# Altium PCB pure60.PcbDoc
Units mm, origin at the board's own origin, x right, y up, seen from the top; angles counter-clockwise.
Board outline 285.25 x 94.86 mm, 2 copper layers (Component Side, Bottom Layer), stack 1.571 mm thick; 142 components, 96 nets, 586 pads, 26 vias.
Unrouted connection lines stored in the file: 30.
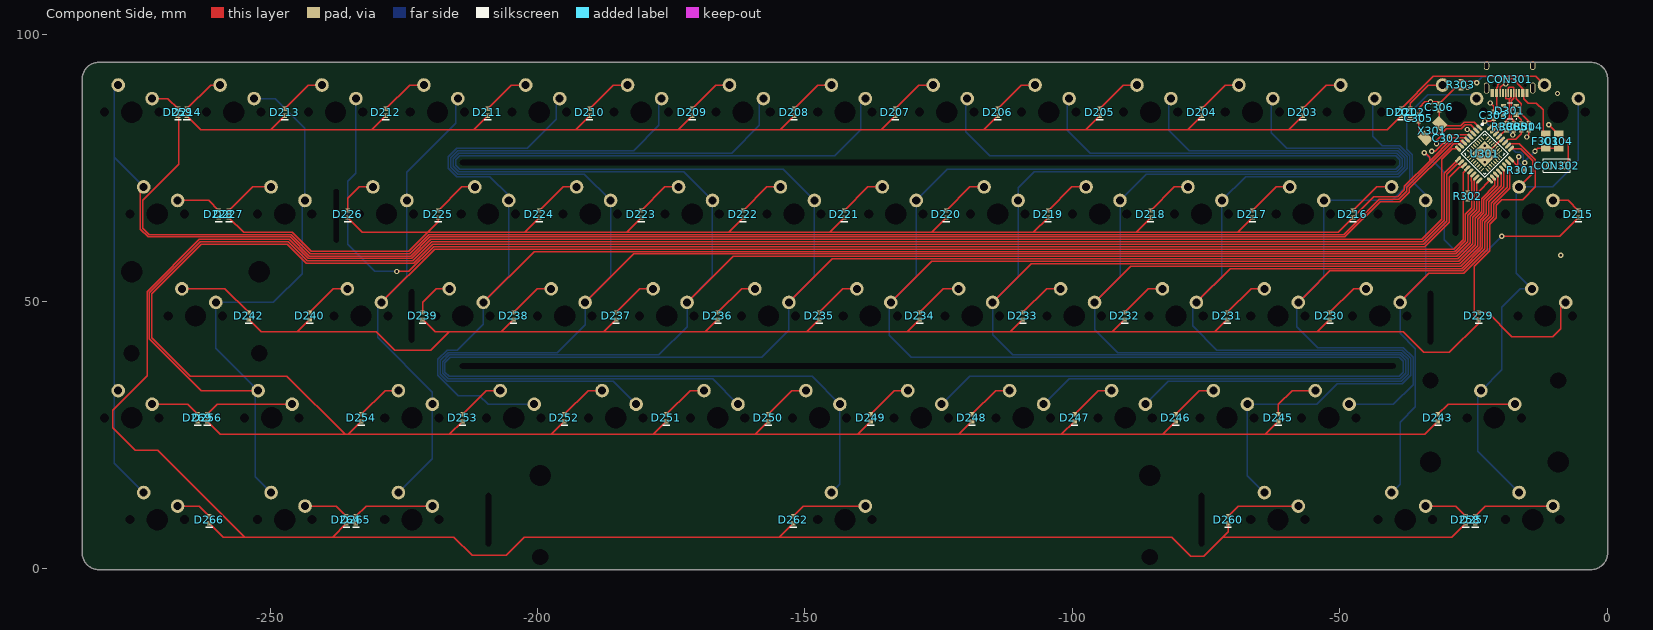
[diagram p0: Component Side view]
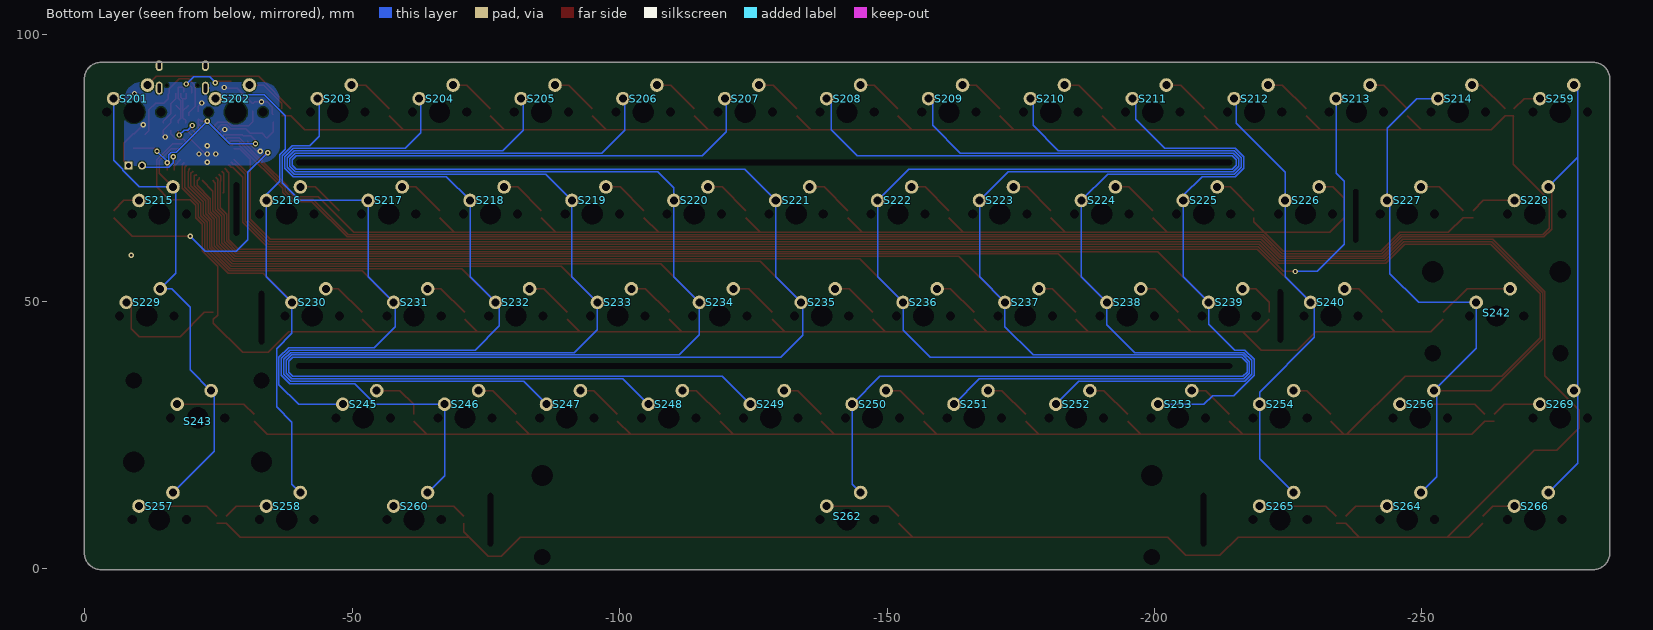
[diagram p1: Bottom Layer view, seen from below]
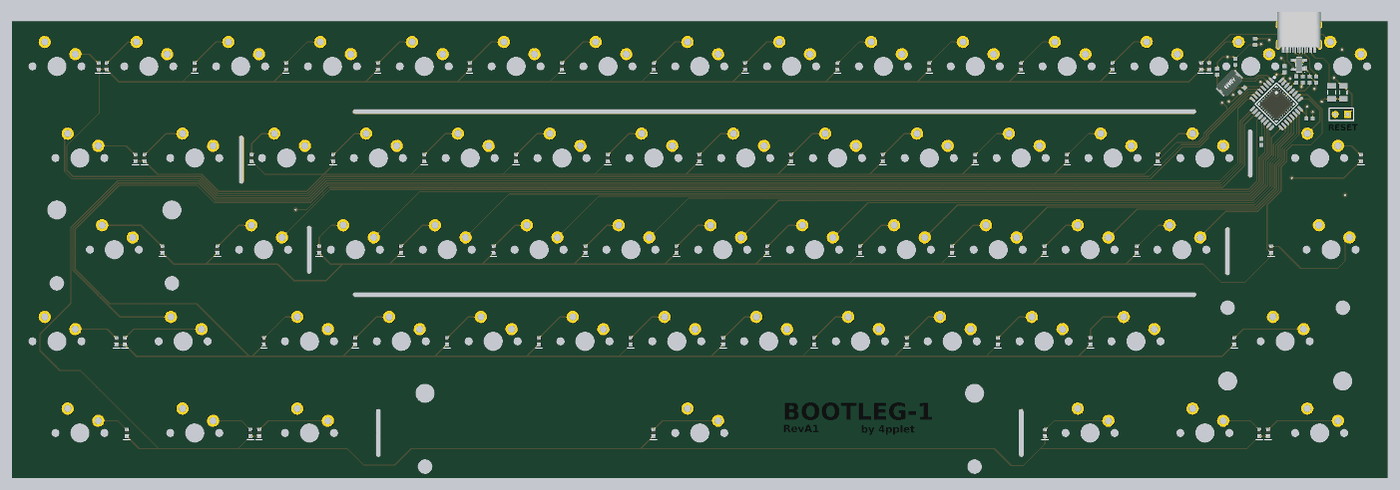
[diagram p2: 3D render of the assembled board from above, using the file's embedded part models]

## Layer stack, top to bottom
Top Solder: solder mask 0.0102, Solder Resist, Dk 3.5
Component Side: signal copper 0.0356
Dielectric 1: core 1.5, FR-4, Dk 4.2
Bottom Layer: signal copper 0.0356
Solder Side: solder mask 0.0102, Solder Resist, Dk 3.5

## Board outline
-285.127,3.01 -285.127,91.615 cw(c-282,91.615) -282,94.742 cw(c-282,94.615) -281.999,94.742 -195.49,94.742 -198.628,94.742 ccw(c-198.628,94.615) -198.629,94.742 -198.628,94.742 -3,94.742 cw(c-3,91.615) 0.127,91.615 0.127,3.01 cw(c-3,3.01) -3,-0.117 cw(c-3,0.01) -3.035,-0.112 -281.965,-0.112 cw(c-282,0.01) -282,-0.117 cw(c-282,3.01)

## Design rules (kind name [scope] priority, off if disabled: settings)
Clearance [All] p1: gap=0.2 ignorepadtopadclearanceinfootprint=FALSE except(0: Arc-Hole Track-Hole SMDPad-Hole THPad-Hole Via-Hole Fill-Hole Poly-Hole Region-Hole Text-Hole; 0.254: THPad-THPad THPad-Via THPad-Fill THPad-Poly THPad-Region THPad-Text Via-Via Via-Fill Via-Poly Via-Region Via-Text Fill-Fill Fill-Poly Fill-Region Fill-Text Poly-Poly Poly-Region Poly-Text Region-Region Region-Text Text-Text)
ComponentClearance [InComponent('No Component') And OnLayer('Component Side')] p1: gap=0.254 collisioncheckmode=3 verticalgap=0.254 showdistances=FALSE
DiffPairsRouting DiffPairsRouting_USB [InDifferentialPairClass('All Differential Pairs')] p1: maxlimit=0.254 minlimit=0.203 mostfreqgap=0.203 toplayer_minwidth=0.152 toplayer_maxwidth=0.381 toplayer_prefwidth=0.152 bottomlayer_minwidth=0.152 bottomlayer_maxwidth=0.381 bottomlayer_prefwidth=0.152 maxuncoupledlength=12.7
DiffPairsRouting [All] p2: maxlimit=0.254 minlimit=0.254 mostfreqgap=0.254 toplayer_minwidth=0.381 toplayer_maxwidth=0.381 toplayer_prefwidth=0.381 bottomlayer_minwidth=0.381 bottomlayer_maxwidth=0.381 bottomlayer_prefwidth=0.381 maxuncoupledlength=12.7
HoleSize [All] p1: absolutevalues=TRUE maxlimit=20 minlimit=0.025 maxpercent=80.000 minpercent=20.000
MatchedLengths MatchedLengths_USB_DiffPairs_1 [All] p1: tolerance=0.127 checknetsindiffpair=TRUE checkdiffpairvsdiffpair=FALSE checkxsignals=FALSE checkothers=FALSE
MatchedLengths MatchedLengths_USB_DiffPairs [All] p2: tolerance=0.127 checknetsindiffpair=TRUE checkdiffpairvsdiffpair=FALSE checkxsignals=FALSE checkothers=FALSE
PolygonConnect PolygonConnect_1 [All vs IsVia] p1: connectstyle=Direct reliefconductorwidth=0.254 reliefentries=4 polygonreliefangle="90 Angle" airgapwidth=0.254
PolygonConnect [All] p2: connectstyle=Relief reliefconductorwidth=0.254 reliefentries=4 polygonreliefangle="90 Angle" airgapwidth=0.254
RoutingVias [All] p1: holewidth=0.711 width=1.27 viastyle="Through Hole" minholewidth=0.711 minwidth=1.27 maxholewidth=0.711 maxwidth=1.27
SolderMaskExpansion [All] p1: expansion=0.102
Width [All] p1: maxlimit=0.254 minlimit=0.203 preferedwidth=0.254
27 further rules are at their usual default settings.

## Classes and differential pairs
component class Designator: C201 C202 C203 C204 C205 C206 D201 D202 D203 D204 D205 D206 D207 D208 D209 D210 D211 D212 D213 D214 D215 D216 D217 D218 D219 D220 D221 D222 D223 D224 D225 D226 D227 D228 D229 D230 D231 D232 D233 D234 D235 D236 D237 D238 D239 D240 D242 D243 D245 D246 D247 D248 D249 D250 D251 D252 D253 D254 D256 D257 D258 D259 D260 D262 D264 D265 D266 D268 D269 S201 S202 S203 S204 S205 S206 S207 S208 S209 S210 S211 S212 S213 S214 S215 S216 S217 S218 S219 S220 S221 S222 S223 S224 S225 S226 S227 S228 S229 S230 S231 S232 S233 S234 S235 S236 S237 S238 S239 S240 S242 S243 S245 S246 S247 S248 S249 S250 S251 S252 S253 S254 S256 S257 S258 S259 S260 S262 S264 S265 S266 S269
differential pair D_PRE: +D_PRE_P -D_PRE_N
differential pair D: +D_P -D_N

## Components (designator, comment, footprint, x,y, rotation, side; value= is the part's Value field where it differs from the comment)
C301 "" C0603[1608] -16.002,82.677 r270 top value=1uF
C302 "" C0603[1608] -29.972,80.518 r45 top value=0.1uF
C303 "" C0603[1608] -21.209,84.836 r270 top value=0.1uF
C304 "" C1206[3216] -9.017,80.01 r270 top value=4,7uF
C305 "" C0603[1608] -35.179,84.313 r270 top value=36pF
C306 "" C0603[1608] -31.369,86.36 r270 top value=36pF
CON301 "TYPE-C-31-M-12" TYPE-C-31-M-12 -18.2,89 r180 top
CON302 "Header 2" HDR1X2 -8.128,75.438 r180 top
D201 "Diode" D0603[1608] -38.481,85.415 r270 top
D202 "Diode" D0603[1608] -36.83,85.415 r270 top
D203 "Diode" D0603[1608] -56.896,85.415 r270 top
D204 "Diode" D0603[1608] -75.819,85.415 r270 top
D205 "Diode" D0603[1608] -94.869,85.415 r270 top
D206 "Diode" D0603[1608] -113.919,85.415 r270 top
D207 "Diode" D0603[1608] -133.096,85.415 r270 top
D208 "Diode" D0603[1608] -152.019,85.415 r270 top
D209 "Diode" D0603[1608] -171.069,85.415 r270 top
D210 "Diode" D0603[1608] -190.246,85.415 r270 top
D211 "Diode" D0603[1608] -209.296,85.415 r270 top
D212 "Diode" D0603[1608] -228.346,85.415 r270 top
D213 "Diode" D0603[1608] -247.269,85.415 r270 top
D214 "Diode" D0603[1608] -265.557,85.415 r270 top
D215 "Diode" D0603[1608] -5.334,66.365 r270 top
D216 "Diode" D0603[1608] -47.498,66.365 r270 top
D217 "Diode" D0603[1608] -66.294,66.365 r270 top
D218 "Diode" D0603[1608] -85.344,66.365 r270 top
D219 "Diode" D0603[1608] -104.521,66.365 r270 top
D220 "Diode" D0603[1608] -123.571,66.365 r270 top
D221 "Diode" D0603[1608] -142.621,66.365 r270 top
D222 "Diode" D0603[1608] -161.544,66.365 r270 top
D223 "Diode" D0603[1608] -180.594,66.365 r270 top
D224 "Diode" D0603[1608] -199.644,66.365 r270 top
D225 "Diode" D0603[1608] -218.567,66.365 r270 top
D226 "Diode" D0603[1608] -235.458,66.365 r270 top
D227 "Diode" D0603[1608] -257.683,66.365 r270 top
D228 "Diode" D0603[1608] -259.588,66.365 r270 top
D229 "Diode" D0603[1608] -24.003,47.315 r270 top
D230 "Diode" D0603[1608] -51.816,47.315 r270 top
D231 "Diode" D0603[1608] -70.993,47.315 r270 top
D232 "Diode" D0603[1608] -90.17,47.315 r270 top
D233 "Diode" D0603[1608] -109.22,47.315 r270 top
D234 "Diode" D0603[1608] -128.524,47.315 r270 top
D235 "Diode" D0603[1608] -147.32,47.315 r270 top
D236 "Diode" D0603[1608] -166.243,47.315 r270 top
D237 "Diode" D0603[1608] -185.293,47.315 r270 top
D238 "Diode" D0603[1608] -204.47,47.315 r270 top
D239 "Diode" D0603[1608] -221.488,47.315 r270 top
D240 "Diode" D0603[1608] -242.57,47.315 r270 top
D242 "Diode" D0603[1608] -254,47.315 r270 top
D243 "Diode" D0603[1608] -31.623,28.265 r270 top
D245 "Diode" D0603[1608] -61.468,28.265 r270 top
D246 "Diode" D0603[1608] -80.645,28.265 r270 top
D247 "Diode" D0603[1608] -99.568,28.265 r270 top
D248 "Diode" D0603[1608] -118.745,28.265 r270 top
D249 "Diode" D0603[1608] -137.668,28.265 r270 top
D250 "Diode" D0603[1608] -156.845,28.265 r270 top
D251 "Diode" D0603[1608] -175.895,28.265 r270 top
D252 "Diode" D0603[1608] -194.945,28.265 r270 top
D253 "Diode" D0603[1608] -213.995,28.265 r270 top
D254 "Diode" D0603[1608] -232.918,28.265 r270 top
D256 "Diode" D0603[1608] -261.747,28.265 r270 top
D257 "Diode" D0603[1608] -24.638,9.215 r270 top
D258 "Diode" D0603[1608] -26.416,9.215 r270 top
D259 "Diode" D0603[1608] -267.208,85.415 r270 top
D260 "Diode" D0603[1608] -70.866,9.215 r270 top
D262 "Diode" D0603[1608] -152.146,9.215 r270 top
D264 "Diode" D0603[1608] -235.712,9.215 r270 top
D265 "Diode" D0603[1608] -233.934,9.215 r270 top
D266 "Diode" D0603[1608] -261.366,9.215 r270 top
D269 "Diode" D0603[1608] -263.525,28.265 r270 top
D301 "PRTR5V0U2X" SOT190P237X120-4N -18.161,85.725 r180 top
F301 "Fuse Thermal" C1206[3216] -11.43,80.01 r90 top
R301 "Res1" R0603[1608] -16.002,74.549 r180 top value=10K
R302 "Res1" R0603[1608] -26.035,69.723 r270 top value=10K
R303 "Res1" R0603[1608] -27.305,90.551 r270 top value=5k1
R304 "Res1" R0603[1608] -14.605,82.677 r270 top value=5k1
R305 "Res1" R0603[1608] -17.399,82.677 r90 top value=22
R306 "Res1" R0603[1608] -18.796,82.692 r90 top value=22
S201 "MX" "MX-SWITCH - SWITCHED POL" -9.15,85.415 r180 bottom locked
S202 "MX" "MX-switch - switched pol" -28.2,85.415 r180 bottom locked
S203 "MX" "MX-SWITCH - SWITCHED POL" -47.25,85.415 r180 bottom locked
S204 "MX" "MX-switch - switched pol" -66.3,85.415 r180 bottom locked
S205 "MX" "MX-switch - switched pol" -85.35,85.415 r180 bottom locked
S206 "MX" "MX-switch - switched pol" -104.4,85.415 r180 bottom locked
S207 "MX" "MX-switch - switched pol" -123.45,85.415 r180 bottom locked
S208 "MX" "MX-switch - switched pol" -142.5,85.415 r180 bottom locked
S209 "MX" "MX-switch - switched pol" -161.55,85.415 r180 bottom locked
S210 "MX" "MX-switch - switched pol" -180.6,85.415 r180 bottom locked
S211 "MX" "MX-switch - switched pol" -199.65,85.415 r180 bottom locked
S212 "MX" "MX-switch - switched pol" -218.7,85.415 r180 bottom locked
S213 "MX" "MX-switch - switched pol" -237.75,85.415 r180 bottom locked
S214 "MX" "MX-switch - switched pol" -256.8,85.415 r180 bottom locked
S215 "MX" "MX-switch - 1.5U" -13.912,66.365 r180 bottom locked
S216 "MX" "MX-SWITCH - SWITCHED POL" -37.725,66.365 r180 bottom locked
S217 "MX" "MX-SWITCH - SWITCHED POL" -56.775,66.365 r180 bottom locked
S218 "MX" "MX-SWITCH - SWITCHED POL" -75.825,66.365 r180 bottom locked
S219 "MX" "MX-SWITCH - SWITCHED POL" -94.875,66.365 r180 bottom locked
S220 "MX" "MX-SWITCH - SWITCHED POL" -113.925,66.365 r180 bottom locked
S221 "MX" "MX-SWITCH - SWITCHED POL" -132.975,66.365 r180 bottom locked
S222 "MX" "MX-SWITCH - SWITCHED POL" -152.025,66.365 r180 bottom locked
S223 "MX" "MX-SWITCH - SWITCHED POL" -171.075,66.365 r180 bottom locked
S224 "MX" "MX-SWITCH - SWITCHED POL" -190.125,66.365 r180 bottom locked
S225 "MX" "MX-SWITCH - SWITCHED POL" -209.175,66.365 r180 bottom locked
S226 "MX" "MX-SWITCH - SWITCHED POL" -228.225,66.365 r180 bottom locked
S227 "MX" "MX-SWITCH - SWITCHED POL" -247.275,66.365 r180 bottom locked
S228 "MX" "MX-SWITCH - 1.5U" -271.087,66.365 r180 bottom locked
S229 "MX" "MX-switch - CAPS - stepped" -16.294,47.315 r180 bottom locked
S230 "MX" "MX-SWITCH - SWITCHED POL" -42.487,47.315 r180 bottom locked
S231 "MX" "MX-SWITCH - SWITCHED POL" -61.537,47.315 r180 bottom locked
S232 "MX" "MX-SWITCH - SWITCHED POL" -80.587,47.315 r180 bottom locked
S233 "MX" "MX-SWITCH - SWITCHED POL" -99.637,47.315 r180 bottom locked
S234 "MX" "MX-SWITCH - SWITCHED POL" -118.687,47.315 r180 bottom locked
S235 "MX" "MX-SWITCH - SWITCHED POL" -137.737,47.315 r180 bottom locked
S236 "MX" "MX-SWITCH - SWITCHED POL" -156.787,47.315 r180 bottom locked
S237 "MX" "MX-SWITCH - SWITCHED POL" -175.837,47.315 r180 bottom locked
S238 "MX" "MX-SWITCH - SWITCHED POL" -194.887,47.315 r180 bottom locked
S239 "MX" "MX-SWITCH - SWITCHED POL" -213.937,47.315 r180 bottom locked
S240 "MX" "MX-SWITCH - SWITCHED POL" -232.987,47.315 r180 bottom locked
S242 "MX" "MX-switch - Enter_ANSI" -263.95,47.315 r180 bottom locked
S243 "MX" "MX-switch - 2.25U" -21.056,28.265 r180 bottom locked
S245 "MX" "MX-SWITCH - SWITCHED POL" -52.012,28.265 r180 bottom locked
S246 "MX" "MX-SWITCH - SWITCHED POL" -71.062,28.265 r180 bottom locked
S247 "MX" "MX-SWITCH - SWITCHED POL" -90.112,28.265 r180 bottom locked
S248 "MX" "MX-SWITCH - SWITCHED POL" -109.162,28.265 r180 bottom locked
S249 "MX" "MX-SWITCH - SWITCHED POL" -128.212,28.265 r180 bottom locked
S250 "MX" "MX-SWITCH - SWITCHED POL" -147.262,28.265 r180 bottom locked
S251 "MX" "MX-SWITCH - SWITCHED POL" -166.312,28.265 r180 bottom locked
S252 "MX" "MX-SWITCH - SWITCHED POL" -185.362,28.265 r180 bottom locked
S253 "MX" "MX-SWITCH - SWITCHED POL" -204.412,28.265 r180 bottom locked
S254 "MX" "MX-SWITCH - SWITCHED POL" -223.462,28.265 r180 bottom locked
S256 "MX" "MX-switch - 1.75" -249.682,28.265 r180 bottom locked
S257 "MX" "MX-SWITCH - 1.5U" -13.912,9.215 r180 bottom locked
S258 "MX" MX-switch -37.719,9.215 r180 bottom
S259 "MX" MX-switch -275.85,85.415 r180 bottom locked
S260 "MX" "MX-SWITCH - 1.5U" -61.537,9.215 r180 bottom locked
S262 "MX" "MX-switch - 7u space" -142.499,9.215 r0 bottom locked
S264 "MX" MX-switch -247.269,9.215 r180 bottom
S265 "MX" "MX-SWITCH - 1.5U" -223.462,9.215 r180 bottom locked
S266 "MX" "MX-SWITCH - 1.5U" -271.087,9.215 r180 bottom locked
S269 "MX" MX-SWITCH -275.85,28.265 r180 bottom locked
U301 "ATMEGA32U2" ATMEGA32U2-COMBO -22.886,77.6 r315 top
X301 "XTAL" "CTS 445-series crystal" -32.639,81.915 r225 top

## Footprints (in the part's own frame and the unit in brackets; to place one, negate y for a bottom-side part, rotate by r counter-clockwise, add the part's x,y. Pads: shape width x height; smd on the part's side, far side on the other; paste and mask are expansions set on the pad)
ATMEGA32U2-COMBO [mm]
  oval 1.4x0.55 smd: 1(-4.2,2.8) 2(-4.2,2) 3(-4.2,1.2) 4(-4.2,0.4) 5(-4.2,-0.4) 6(-4.2,-1.2) 7(-4.2,-2) 8(-4.2,-2.8) 17(4.2,-2.8) 18(4.2,-2) 19(4.2,-1.2) 20(4.2,-0.4) 21(4.2,0.4) 22(4.2,1.2) 23(4.2,2) 24(4.2,2.8)
  oval 0.85x0.25 smd: 1(-2.4,1.75) 2(-2.4,1.25) 3(-2.4,0.75) 4(-2.4,0.25) 5(-2.4,-0.25) 6(-2.4,-0.75) 7(-2.4,-1.25) 8(-2.4,-1.75) 17(2.4,-1.75) 18(2.4,-1.25) 19(2.4,-0.75) 20(2.4,-0.25) 21(2.4,0.25) 22(2.4,0.75) 23(2.4,1.25) 24(2.4,1.75)
  oval 0.55x1.4 smd: 9(-2.8,-4.2) 10(-2,-4.2) 11(-1.2,-4.2) 12(-0.4,-4.2) 13(0.4,-4.2) 14(1.2,-4.2) 15(2,-4.2) 16(2.8,-4.2) 25(2.8,4.2) 26(2,4.2) 27(1.2,4.2) 28(0.4,4.2) 29(-0.4,4.2) 30(-1.2,4.2) 31(-2,4.2) 32(-2.8,4.2)
  oval 0.25x0.85 smd: 9(-1.75,-2.4) 10(-1.25,-2.4) 11(-0.75,-2.4) 12(-0.25,-2.4) 13(0.25,-2.4) 14(0.75,-2.4) 15(1.25,-2.4) 16(1.75,-2.4) 25(1.75,2.4) 26(1.25,2.4) 27(0.75,2.4) 28(0.25,2.4) 29(-0.25,2.4) 30(-0.75,2.4) 31(-1.25,2.4) 32(-1.75,2.4)
  rect 3.5x3.5 smd: 28(0,0)
  silkscreen extent -4.32,-3.1 3.1,3.75, body extent -2.51,-2.51 2.51,2.51, height 1
C0603[1608] [mm] "Chip Resistor, 2-Leads, Body 1,57x0,80mm, IPC Medium Density"
  rect 0.8x0.85 smd: 1(-0.65,0) 2(0.65,0)
  body extent -0.83,-0.43 0.82,0.43, height 0.5
C1206[3216] [mm]
  rect 1.2x1.8 smd: 1(-1.35,0) 2(1.35,0)
  silkscreen extent -0.35,-0.8 0.35,0.8, body extent -1.6,-0.9 1.6,0.9, height 1.2
"CTS 445-series crystal" [mm]
  rect 1.8x2.4 smd: 1(-1.9,0) 2(1.9,0)
  body extent -2.5,-1.6 2.5,1.6, height 1.3
D0603[1608] [mm] "Chip Resistor, 2-Leads, Body 1,57x0,80mm, IPC Medium Density"
  rect 0.8x0.85 smd: 1(-0.65,0) 2(0.65,0)
  silkscreen extent 1.4,-0.63 1.4,0.64, body extent -0.8,-0.45 0.8,0.45, height 0.59
HDR1X2 [mm] "Connector; Header; 2 Position"
  rect 1.5x1.5 hole 0.9: 1(0,0)
  round 1.5 hole 0.9: 2(2.54,0)
  silkscreen extent -1.27,-1.27 3.81,1.27
MX-switch [mm]
  round 2.54 hole 1.499 mask+0.102: 1(-3.81,2.54) 2(2.54,5.08)
  round 1 hole 1.702 unplated: ""(-5.08,0) ""(5.08,0)
  round 1 hole 3.988 unplated: ""(0,0)
MX-SWITCH [mm]
  round 2.54 hole 1.499 mask+0.102: 1(-3.81,2.54) 2(2.54,5.08)
  round 1 hole 1.702 unplated: ""(-5.08,0) ""(5.08,0)
  round 1 hole 3.988 unplated: ""(0,0)
"MX-switch - 1.5U" [mm]
  round 2.54 hole 1.499 mask+0.102: 1(-3.81,2.54) 2(2.54,5.08)
  round 1 hole 1.702 unplated: ""(-5.08,0) ""(5.08,0)
  round 1 hole 3.988 unplated: ""(0,0)
  round 1 on Mech14: ""(0,0)
"MX-SWITCH - 1.5U" [mm]
  round 2.54 hole 1.499 mask+0.102: 1(-3.81,2.54) 2(2.54,5.08)
  round 1 hole 1.702 unplated: ""(-5.08,0) ""(5.08,0)
  round 1 hole 3.988 unplated: ""(0,0)
  round 1 on Mech14: ""(0,0)
"MX-switch - 1.75" [mm]
  round 2.54 hole 1.499 mask+0.102: 1(-3.81,2.54) 2(2.54,5.08)
  round 1 hole 1.702 unplated: ""(-5.08,0) ""(5.08,0)
  round 1 hole 3.988 unplated: ""(0,0)
  round 1 on Mech14: ""(0,0)
"MX-switch - 2.25U" [mil]
  round 100 hole 59 mask+4: 1(-150,100) 2(100,200)
  round 60 hole 157.01 unplated: ""(-470,-325) ""(470,-325)
  round 60 hole 120 unplated: ""(-470,275) ""(470,275)
  round 39.37 hole 67.01 unplated: ""(-200,0) ""(200,0)
  round 39.37 hole 157.01 unplated: ""(0,0)
  round 39.37 on Mech14: ""(0,0)
"MX-switch - 7u space" [mm]
  round 2.54 hole 1.499 mask+0.102: 1(3.81,-2.54) 2(-2.54,-5.08)
  round 1.524 hole 3.988 unplated: ""(-57,-8.255) ""(57,-8.255)
  round 1.524 hole 3.048 unplated: ""(-57,6.985) ""(57,6.985)
  round 1 hole 1.702 unplated: ""(-5.08,0) ""(5.08,0)
  round 1 hole 3.988 unplated: ""(0,0)
  round 1 on Mech14: ""(0,0)
"MX-switch - CAPS - stepped" [mm]
  round 2.54 hole 1.499 mask+0.102: 1(-8.572,2.54) 2(-2.222,5.08)
  round 1 hole 1.702 unplated: ""(-9.842,0) ""(0.318,0)
  round 1 hole 3.988 unplated: ""(-4.763,0)
  round 1 on Mech14: ""(-4.763,0) ""(0,0)
"MX-switch - Enter_ANSI" [mil]
  round 100 hole 59 mask+4: 1(100,200) 2(-150,100)
  round 60 hole 120 unplated: ""(-470,-275) ""(470,-275)
  round 60 hole 157.01 unplated: ""(-470,325) ""(470,325)
  round 39.37 on Mech14: ""(-468.75,0) ""(-468.75,0) ""(0,0) ""(0,0)
  round 39.37 hole 67.01 unplated: ""(-200,0) ""(200,0)
  round 39.37 hole 157.01 unplated: ""(0,0)
"MX-SWITCH - SWITCHED POL" [mm]
  round 2.54 hole 1.499 mask+0.102: 1(2.54,5.08) 2(-3.81,2.54)
  round 1 hole 1.702 unplated: ""(-5.08,0) ""(5.08,0)
  round 1 hole 3.988 unplated: ""(0,0)
"MX-switch - switched pol" [mm]
  round 2.54 hole 1.499 mask+0.102: 1(2.54,5.08) 2(-3.81,2.54)
  round 1 hole 1.702 unplated: ""(-5.08,0) ""(5.08,0)
  round 1 hole 3.988 unplated: ""(0,0)
R0603[1608] [mm] "Chip Resistor, 2-Leads, Body 1,57x0,80mm, IPC Medium Density"
  rect 0.8x0.85 smd: 1(-0.65,0) 2(0.65,0)
  body extent -0.83,-0.43 0.82,0.43, height 0.5
SOT190P237X120-4N [mm] "SOT143, 4-Leads, Body 3,00x2,37mm, Pitch 1,90mm, IPC Medium Density"
  rect 1x1 smd: 1(-1.2,0.75)
  rect 1x0.6 smd: 2(-1.2,-0.95) 3(1.2,-0.95) 4(1.2,0.95)
  silkscreen extent -1.25,-1.5 0.7,1.6, body extent -1.25,-1.5 1.24,1.5, height 1.09
TYPE-C-31-M-12 [mm]
  rect 0.6x1.45 smd: A1B12(-3.25,0) A4B9(-2.45,0) B1A12(3.25,0) B4A9(2.45,0)
  rect 0.3x1.45 smd: A5(-1.25,0) A6(-0.25,0) A7(0.25,0) A8(1.25,0) B5(1.75,0) B6(0.75,0) B7(-0.75,0) B8(-1.75,0)
  oval 1x2.1 / inner oval 1x2.1 / far side oval 1.3x2.4 hole 0.6 slot 1.7 at 90 deg: S1(-4.32,-0.915) S1(4.32,-0.915)
  oval 1x1.6 / inner oval 1x1.6 / far side oval 1.3x2 hole 0.6 slot 1.2 at 90 deg: S1(-4.32,-5.095) S1(4.32,-5.095)
  round 0 hole 0.65 unplated: ""(-2.89,-1.445) ""(2.89,-1.445)
  body extent -4.47,-7.72 4.47,0.18, height 3.21

## Part data
C301: library part Cap, "Capacitor", LCSC MFG="Samsung Electro-Mechanics", LCSCPN=C15849, MFG=KEMET, MFGPN=C0603C104M5RACTU, MRF.Part=CL10A105KB8NNNC, Version="0603 imperial"
C302 C303: library part Cap, "Capacitor", LCSC MFG=YAGEO, LCSCPN=C14663, MFG=KEMET, MFGPN=C0603C104M5RACTU, MRF.Part=CC0603KRX7R9BB104, Version="0603 imperial"
C304: library part Cap, "Capacitor", LCSC MFG="Guangdong Fenghua Advanced Tech", LCSCPN=C29823, MFG=KEMET, MFGPN=C0603C104M5RACTU, MRF.Part=1206B475K500NT, Version="1206 imperial"
C305 C306: library part Cap, "Capacitor", LCSC MFG="Samsung Electro-Mechanics", LCSCPN=C159790, MFG=KEMET, MFGPN=C0603C104M5RACTU, MRF.Part=CL10C360JB8NNNC, Version="0603 imperial"
CON301: LCSC MFG="Korean Hroparts Elec", LCSCPN=C165948, MFG="Korean Hroparts Elec", MFGPN=TYPE-C-31-M-12, MRF.Part=TYPE-C-31-M-12
CON302: "Header, 2-Pin"
D201 D202 D203 D204 D205 D206 D207 D208 D209 D210 D211 D212 D213 D214 D215 D216 D217 D218 D219 D220 D221 D222 D223 D224 D225 D226 D227 D228 D229 D230 D231 D232 D233 D234 D235 D236 D237 D238 D239 D240 D242 D243 D245 D246 D247 D248 D249 D250 D251 D252 D253 D254 D256 D257 D258 D259 D260 D262 D264 D265 D266 D269: "Default Diode", LCSC MFG="Brightking Elec (TAIWAN)", LCSCPN=C109002, MFG="Bourns Inc.", MFGPN=CD0603-B0340R, MRF.Part=CD4148WTP, Version="0603 imperial"
D301: LCSC MFG="Brightking Elec (TAIWAN)", LCSCPN=C78442, MFG="Nexperia USA Inc.", MFGPN=PRTR5V0U2X,215, MRF.Part=UET14A05L03
F301: "Thermal Fuse", LCSC MFG="Shenzhen JDT Fuse", LCSCPN=C135338, MFG="Bel Fuse Inc.", MFGPN=0ZCJ0050FF2G, MRF.Part=ASMD1206-050
R301 R302: "Resistor", LCSC MFG="Uniroyal Elec", LCSCPN=C25804, MFG="Panasonic Electronic Components", MFGPN=ERJ-3EKF5101V, MRF.Part=0603WAF1002T5E, Version="0603 imperial"
R303 R304: "Resistor", LCSC MFG="Uniroyal Elec", LCSCPN=C23186, MFG="Panasonic Electronic Components", MFGPN=ERJ-3EKF5101V, MRF.Part=0603WAF5101T5E, Version="0603 imperial"
R305 R306: "Resistor", LCSC MFG="Uniroyal Elec", LCSCPN=C23345, MFG="Panasonic Electronic Components", MFGPN=ERJ-3EKF5101V, MRF.Part=0603WAF220JT5E, Version="0603 imperial"
S201 S202 S203 S204 S205 S206 S207 S208 S209 S210 S211 S212 S213 S214 S216 S217 S218 S219 S220 S221 S222 S223 S224 S225 S226 S227 S228 S229 S230 S231 S232 S233 S234 S235 S236 S237 S238 S239 S240 S242 S243 S245 S246 S247 S248 S249 S250 S251 S252 S253 S254 S256 S257 S258 S259 S260 S262 S264 S265 S266 S269: library part SW-PB, "Switch"
S215: library part SW-PB, "TAB"
U301: LCSC MFG="Microchip Tech", LCSCPN=C57345, MFG="Microchip Technology", MFGPN=ATMEGA32U2-AUR, MRF.Part=ATMEGA32U2-MU
X301: "Crystal Oscillator", LCSC MFG="Yangxing Tech", LCSCPN=C112572, MRF.Part=X503216MSB2GI

## Free pads (board coordinates)
  round 0 hole 1 slot 10 at 90 deg: ""(-237.617,66.04) ""(-223.52,47.315) ""(-209.169,9.215) ""(-75.819,9.215) ""(-33.02,46.99) ""(-28.321,67.31)
  round 0 hole 1 slot 175 at 0 deg: ""(-127,37.973) ""(-127,76.017)

## Via types
v1: diameter 1, hole 0.5, Component Side to Bottom Layer, tented both sides, 21 vias
v2: diameter 1, hole 0.5, Component Side to Bottom Layer, tented bottom, 5 vias

## Nets (pads, with @x,y where several pads share a name; then routed paths per layer and width w, separated by ;. In a path a pad name is that pad's centre, name@x,y a point inside that pad or via, vN(x,y) a via of type N, cw(c..) or ccw(c..) an arc to the next point about the centre after c; other vN are vias at no path point)
col1: S201.2 S215.2 S229.2 S243.2 S257.2 U301.25 | length 103
  Component Side w0.254: U301.25@-17.936,78.59 -16.113,78.59 -13.843,76.32 -13.843,74.041 -16.439,71.445 S215.2 ; S201.2 S201.2@-5.334,87.949
  Bottom Layer w0.254: S257.2 -24.13,21.973 -24.13,32.811 S243.2 -23.551,33.345 -19.685,37.211 -19.685,48.895 -16.185,52.395 S229.2 -17.018,55.342 -17.018,70.88 S215.2 -10.159,71.445 -7.051,74.553 -7.051,74.743 -5.34,76.454 S201.2
col2: S202.2 S216.2 S230.2 S258.2 U301.23 | length 132.1
  Component Side w0.254: -37.735,50.797 S230.2 -38.677,49.969 -33.372,55.274 -26.824,55.274 -22.384,59.714 -22.384,64.675 -21.187,65.872 -21.187,68.214 -18.215,71.186 -18.215,74.879 -18.165,74.929 -18.165,75.765 -18.502,75.765 U301.23@-18.502,76.045
  Bottom Layer w0.254: S258.2 -38.677,15.877 -38.677,27.432 -35.814,30.295 -35.814,41.206 -38.677,44.069 S230.2 -33.915,54.618 S216.2 -33.915,69.983 -36.449,72.517 -36.449,77.488 -37.465,78.504 -37.465,84.709 -33.528,88.646 -25.081,88.646 S202.2
col3: S203.2 S217.2 S231.2 S245.2 U301.22 | length 163.1
  Component Side w0.254: S231.2 -55.894,51.689 -55.88,51.689 -51.841,55.728 -27.013,55.728 -22.838,59.903 -22.838,64.863 -21.641,66.06 -21.641,68.402 -18.669,71.374 -18.669,75.08 U301.22@-19.068,75.479
  Bottom Layer w0.254: S245.2 -39.934,30.805 -36.268,34.471 -36.268,39.57 -38.085,41.387 -54.087,41.387 -58.039,45.339 -58.039,49.544 S231.2 -52.965,54.618 S217.2 -40.188,68.905 -36.903,72.19 -36.903,77.3 -38.717,79.114 -42.037,79.114 -43.815,80.892 -43.815,87.58 S203.2
col4: S204.2 S218.2 S232.2 S246.2 S260.2 U301.21 | length 270.2
  Component Side w0.254: S232.2 -70.45,56.182 -27.201,56.182 -23.292,60.091 -23.292,65.051 -22.095,66.248 -22.095,68.689 -19.297,71.487 -19.297,74.358 -19.358,74.358 -19.358,74.638 U301.21@-19.633,74.913
  Bottom Layer w0.254: S260.2 -67.252,17.47 S246.2 -54.285,30.805 -50.443,34.647 -38.324,34.647 -36.722,36.249 -36.722,39.382 -38.273,40.933 -72.937,40.933 -77.47,45.466 -77.47,49.163 S232.2 -72.015,54.618 S218.2 -67.546,73.374 -38.905,73.374 -37.357,74.922 -37.357,77.112 -38.905,78.66 -59.864,78.66 -62.738,81.534 -62.738,87.707 S204.2
col5: S205.2 S219.2 S233.2 S247.2 U301.20 | length 343.5
  Component Side w0.254: S233.2 -89.046,56.636 -27.389,56.636 -23.746,60.279 -23.746,65.239 -22.549,66.436 -22.549,68.877 -19.812,71.614 -19.812,73.961 U301.20@-20.199,74.348
  Bottom Layer w0.254: S247.2 -82.006,35.101 -38.512,35.101 -37.176,36.437 -37.176,39.194 -38.461,40.479 -91.532,40.479 -95.827,44.775 S233.2 -91.065,54.618 S219.2 -86.142,73.828 -39.093,73.828 -37.811,75.11 -37.811,76.924 -39.093,78.206 -78.079,78.206 -81.915,82.042 -81.915,87.58 S205.2
col6: S206.2 S220.2 S234.2 S248.2 U301.19 | length 437.6
  Component Side w0.254: S234.2 -107.642,57.09 -27.577,57.09 -24.2,60.467 -24.2,65.427 -23.003,66.624 -23.003,69.065 -20.428,71.64 -20.428,73.642 -20.905,73.642 U301.19@-20.765,73.782
  Bottom Layer w0.254: S248.2 -100.602,35.555 -38.7,35.555 -37.63,36.625 -37.63,39.006 -38.649,40.025 -111.144,40.025 -114.877,43.759 S234.2 -110.115,54.618 S220.2 -110.115,71.241 -107.074,74.282 -39.281,74.282 -38.265,75.298 -38.265,76.736 -39.281,77.752 -96.675,77.752 -100.965,82.042 -100.965,87.58 S206.2
col7: S207.2 S221.2 S235.2 S249.2 U301.18 | length 528.1
  Component Side w0.254: S235.2 -126.238,57.544 -27.765,57.544 -24.654,60.655 -24.654,65.615 -23.457,66.812 -23.457,69.253 -20.994,71.716 -20.994,72.599 -21.33,72.936 U301.18@-21.33,73.216
  Bottom Layer w0.254: S249.2 -119.198,36.009 -38.888,36.009 -38.084,36.813 -38.084,38.818 -38.837,39.571 -130.122,39.571 -134.239,43.688 -134.239,49.544 S235.2 -129.165,54.618 S221.2 -123.334,74.736 -39.469,74.736 -38.719,75.486 -38.719,76.548 -39.469,77.298 -115.398,77.298 -119.888,81.788 -119.888,87.707 S207.2
col8: S208.2 S222.2 S236.2 S250.2 S262.2 U301.17 | length 488.9
  Component Side w0.254: S236.2 -144.834,57.998 -27.953,57.998 -25.108,60.843 -25.108,65.803 -23.911,67 -23.911,70.636 U301.17@-21.896,72.651
  Bottom Layer w0.254: S262.2 -143.452,15.882 S250.2 -148.656,36.009 -216.476,36.009 -217.297,36.83 -217.297,38.608 -216.334,39.571 -158.041,39.571 -152.977,44.635 S236.2 -148.215,54.618 S222.2 -154.046,74.736 -214.531,74.736 -215.281,75.486 -215.281,76.548 -214.531,77.298 -144.444,77.298 -139.573,82.169 -139.573,87.072 S208.2
col9: S209.2 S223.2 S237.2 S251.2 U301.16 | length 414.9
  Component Side w0.254: S237.2 -163.43,58.452 -28.141,58.452 -25.562,61.031 -25.562,65.991 -24.365,67.188 -24.365,72.162 U301.16@-23.876,72.651
  Bottom Layer w0.254: S251.2 -167.252,35.555 -216.664,35.555 -217.751,36.642 -217.751,38.796 -216.522,40.025 -177.272,40.025 -172.027,45.27 S237.2 -167.265,54.618 S223.2 -172.642,74.282 -214.719,74.282 -215.735,75.298 -215.735,76.736 -214.719,77.752 -163.675,77.752 -158.496,82.931 -158.496,87.199 S209.2
col10: S210.2 S224.2 S238.2 S252.2 U301.15 | length 360
  Component Side w0.254: S238.2 -182.026,58.906 -28.329,58.906 -26.016,61.219 -26.016,66.179 -24.819,67.376 -24.819,72.712 -24.882,72.775 U301.15@-24.442,73.216
  Bottom Layer w0.254: S252.2 -185.848,35.101 -216.852,35.101 -218.205,36.454 -218.205,38.984 -216.71,40.479 -196.249,40.479 -191.077,45.651 S238.2 -186.315,54.618 S224.2 -191.238,73.828 -214.907,73.828 -216.189,75.11 -216.189,76.924 -214.907,78.206 -199.125,78.206 -199.125,78.232 -181.991,78.232 -177.292,82.931 -177.292,87.453 S210.2
col11: S211.2 S225.2 S239.2 S253.2 U301.14 | length 304.8
  Component Side w0.254: S239.2 -200.622,59.36 -28.517,59.36 -26.47,61.407 -26.47,66.367 -25.273,67.564 -25.273,72.524 -25.344,72.595 -25.344,73.445 U301.14@-25.007,73.782
  Bottom Layer w0.254: S253.2 -209.24,30.805 -210.837,32.402 -214.795,32.402 -218.659,36.266 -218.659,39.172 -216.898,40.933 -214.972,40.933 -210.127,45.778 S239.2 -205.365,54.618 S225.2 -205.365,69.862 -208.877,73.374 -215.095,73.374 -216.643,74.922 -216.643,77.112 -215.095,78.66 -201.883,78.66 -196.469,84.074 -196.469,87.326 S211.2
col12: S212.2 S226.2 S240.2 S254.2 S265.2 U301.12 | length 307.5
  Component Side w0.254: S240.2 -219.218,59.814 -28.705,59.814 -26.924,61.595 -26.924,74.128 U301.12@-26.139,74.913
  Bottom Layer w0.254: S265.2 -219.652,20.645 S254.2 -219.652,33.089 -229.87,43.307 -229.87,49.163 S240.2 -224.415,54.618 S226.2 -224.415,74.162 -215.265,83.312 -215.265,87.58 S212.2
col13: S213.2 U301.11 | length 251.9
  Component Side w0.254: v1(-226.314,55.626) -224.049,55.626 -219.407,60.268 -34.072,60.268 -29.499,64.841 -29.499,73.244 -27.601,75.142 -27.321,75.142 -26.984,75.479 U301.11@-26.704,75.479
  Bottom Layer w0.254: S213.2 -233.94,74.035 -235.458,72.517 -235.458,60.706 -230.378,55.626 v1(-226.314,55.626)
col14: S214.2 S227.2 S242.2 S256.2 S264.2 U301.9 | length 394
  Component Side w0.254: S256.2 -262.834,33.345 -272.542,43.053 -272.542,51.689 -263.055,61.176 -246.589,61.176 -243.017,57.604 -223.355,57.604 -219.783,61.176 -34.448,61.176 -30.407,65.217 -30.407,74.039 U301.9@-27.836,76.61
  Bottom Layer w0.254: S214.2 -248.991,87.955 -243.465,82.429 S227.2 -243.967,68.403 -243.967,55.245 -249.357,49.855 S242.2 -260.14,41.263 S256.2 -252.73,32.837 -252.73,17.216 S264.2
col15: S228.2 S259.2 S266.2 S269.2 U301.7 | length 353.8
  Component Side w0.254: S228.2 -274.266,70.807 -274.266,63.566 -272.784,62.084 -246.213,62.084 -242.641,58.512 -223.731,58.512 -220.159,62.084 -49.034,62.084 -42.43,68.688 -38.797,68.688 -36.995,70.49 -36.995,71.148 -29.426,78.716 -29.411,78.716 -28.634,79.493 -27.642,79.493 -27.642,79.248 -27.362,79.248 U301.7@-27.27,79.156
  Bottom Layer w0.254: S259.2 -279.146,89.739 -279.146,76.964 ; S266.2 -279.146,19.814 -279.146,32.589 S269.2 -279.146,34.101 -279.146,76.964 ; S228.2 -279.146,76.964
D_N: CON301.A7 CON301.B7 D301.2 R305.2 | length 10.1
  Component Side w0.254: CON301.A7@-18.427,89.154 -18.427,89.86 -18.235,90.052 -17.473,90.052 -17.473,89 CON301.B7 -17.45,88.016 -17.869,87.597 -17.869,85.767 ; R305.2 -17.399,83.854 -17.869,84.324 -17.869,85.767 ; D301.2 -17.869,85.767
D_P: CON301.A6 CON301.B6 D301.3 R306.2 | length 9.3
  Component Side w0.254: D301.3 -18.326,85.64 ; CON301.B6 -18.927,88.977 -18.927,87.948 -18.165,87.948 ; R306.2 -18.796,83.869 -18.326,84.339 -18.326,85.64 ; CON301.A6 -17.95,88.163 -18.165,87.948 ; -18.326,85.64 -18.326,87.786 -18.165,87.948
D_PRE_N: R305.1 U301.30 | length 5.9
  Component Side w0.254: U301.30@-20.765,81.419 -20.066,82.117 v1(-20.066,82.931) ; v1(-17.653,81.153) -17.399,81.407 R305.1
  Bottom Layer w0.254: v1(-20.066,82.931) -19.177,82.042 -18.542,82.042 v1(-17.653,81.153)
D_PRE_P: R306.1 U301.29 | length 1.9
  Component Side w0.254: U301.29@-20.199,80.853 -19.01,82.042 R306.1
GND: C301.1 C302.1 C303.1 C304.1 C305.1 C306.1 CON301.A1B12 CON301.B1A12 CON301.S1 CON302.1 D301.1 R302.2 R303.2 R304.2 U301.3 U301.28 | length 38.4
  Component Side w0.254: C305.1 -35.052,85.09 -35.052,86.36 -34.036,87.376 v1(-33.02,87.376) -31.735,87.376 C306.1 -28.478,89.901 R303.2 -26.177,89.901 v1(-26.035,90.043) ; v1(-32.766,78.105) -32.104,78.105 -30.432,79.778 C302.1 ; v1(-26.162,82.169) -25.758,82.169 U301.3@-25.007,81.419 ; v2(-22.886,77.6) -22.533,77.6 -21.012,79.121 -19.845,80.287 U301.28@-19.633,80.287 ; v1(-21.844,87.122) -21.209,86.487 C303.1 ; D301.1 -16.002,84.016 C301.1 -15.905,83.327 R304.2 -14.605,81.153 v1(-14.986,80.772) ; v1(-10.922,83.058) -9.224,81.36 C304.1 -7.239,79.582 -7.239,76.327 CON302.1
  other v1: -8.636,58.674 -9.271,88.9
  other v2: -22.886,76.045 -24.442,77.6 -21.33,77.6 -22.886,79.156
NetC301_2: C301.2 U301.27 | length 4.4
  Component Side w0.254: U301.27@-19.068,79.722 -18.463,80.326 -17.083,80.326 -16.002,81.407 C301.2
NetC305_2: C305.2 U301.2 X301.2 | length 14.6
  Component Side w0.254: C305.2 -35.179,81.768 X301.2 -33.107,81.447 -30.948,81.447 -30.073,82.321 -27.229,82.321 -26.492,83.058 -25.515,83.058 U301.2@-24.442,81.984
NetC306_2: C306.2 U301.1 X301.1 | length 10.8
  Component Side w0.254: C306.2 -31.369,83.586 -30.533,82.751 -30.533,82.887 -27.305,82.887 -26.68,83.512 -24.838,83.512 U301.1@-23.876,82.55
NetCON301_A5: CON301.A5 R304.1 | length 6.6
  Component Side w0.254: CON301.A5 -16.95,87.943 -16.002,86.995 -16.002,85.09 -14.605,83.693 R304.1
NetCON301_B5: CON301.B5 R303.1 | length 12.1
  Component Side w0.254: R303.1 -24.653,91.201 v1(-24.384,90.932) v1@-24.511,90.805 ; CON301.B5 -19.927,89.023 -19.927,90.052 -19.301,90.678 v1(-18.923,90.678)
  Bottom Layer w0.254: v1(-24.384,90.932) -24.384,91.059 -23.368,92.075 -20.32,92.075 v1(-18.923,90.678)
NetD201_1: D201.1 S201.1 | length 29.9
  Component Side w0.254: D201.1 -32.454,92.092 -13.287,92.092 S201.1
NetD202_1: D202.1 S202.1 | length 8.5
  Component Side w0.254: D202.1 -36.83,87.074 -33.409,90.495 S202.1
NetD203_1: D203.1 S203.1 | length 8.9
  Component Side w0.254: D203.1 -52.466,90.495 S203.1
NetD204_1: D204.1 S204.1 | length 8.8
  Component Side w0.254: D204.1 -71.389,90.495 S204.1
NetD205_1: D205.1 S205.1 | length 8.8
  Component Side w0.254: D205.1 -90.439,90.495 S205.1
NetD206_1: D206.1 S206.1 | length 8.8
  Component Side w0.254: D206.1 -109.489,90.495 S206.1
NetD207_1: D207.1 S207.1 | length 8.9
  Component Side w0.254: D207.1 -128.666,90.495 S207.1
NetD208_1: D208.1 S208.1 | length 8.8
  Component Side w0.254: D208.1 -147.589,90.495 S208.1
NetD209_1: D209.1 S209.1 | length 8.8
  Component Side w0.254: D209.1 -166.639,90.495 S209.1
NetD210_1: D210.1 S210.1 | length 8.9
  Component Side w0.254: D210.1 -185.816,90.495 S210.1
NetD211_1: D211.1 S211.1 | length 8.9
  Component Side w0.254: D211.1 -204.866,90.495 S211.1
NetD212_1: D212.1 S212.1 | length 8.9
  Component Side w0.254: D212.1 -223.916,90.495 S212.1
NetD213_1: D213.1 S213.1 | length 8.8
  Component Side w0.254: D213.1 -242.839,90.495 S213.1
NetD214_1: D214.1 S214.1 | length 8.1
  Component Side w0.254: D214.1 -261.127,90.495 S214.1
NetD215_1: D215.1 S215.1 | length 5.6
  Component Side w0.254: S215.1 -7.224,68.905 D215.1
NetD216_1: D216.1 S216.1 | length 9.1
  Component Side w0.254: D216.1 -43.068,71.445 S216.1
NetD217_1: D217.1 S217.1 | length 8.8
  Component Side w0.254: D217.1 -61.864,71.445 S217.1
NetD218_1: D218.1 S218.1 | length 8.8
  Component Side w0.254: D218.1 -80.914,71.445 S218.1
NetD219_1: D219.1 S219.1 | length 8.9
  Component Side w0.254: D219.1 -100.091,71.445 S219.1
NetD220_1: D220.1 S220.1 | length 9.7
  Component Side w0.254: D220.1 -119.141,71.445 S220.1 S220.1@-116.967,70.943
NetD221_1: D221.1 S221.1 | length 8.9
  Component Side w0.254: D221.1 -138.191,71.445 S221.1
NetD222_1: D222.1 S222.1 | length 8.8
  Component Side w0.254: D222.1 -157.114,71.445 S222.1
NetD223_1: D223.1 S223.1 | length 8.8
  Component Side w0.254: D223.1 -176.164,71.445 S223.1
NetD224_1: D224.1 S224.1 | length 8.8
  Component Side w0.254: D224.1 -195.214,71.445 S224.1
NetD225_1: D225.1 S225.1 | length 8.7
  Component Side w0.254: D225.1 -214.137,71.445 S225.1
NetD226_1: D226.1 S226.1 | length 7.9
  Component Side w0.254: D226.1 -235.458,69.301 -233.314,71.445 S226.1
NetD227_1: D227.1 S227.1 | length 10.4
  Component Side w0.254: D227.1 -253.253,71.445 S227.1 S227.1@-250.317,70.943
NetD228_1: D228.1 S228.1 | length 8.5
  Component Side w0.254: S228.1 -261.478,68.905 D228.1
NetD229_1: D229.1 S229.1 | length 23.2
  Component Side w0.254: D229.1 -22.311,47.965 -17.78,43.434 -10.16,43.434 -8.636,44.958 -8.636,48.94 S229.1
NetD230_1: D230.1 S230.1 | length 8.6
  Component Side w0.254: D230.1 -47.386,52.395 S230.1
NetD231_1: D231.1 S231.1 | length 8.8
  Component Side w0.254: D231.1 -66.563,52.395 S231.1
NetD232_1: D232.1 S232.1 | length 8.9
  Component Side w0.254: D232.1 -85.74,52.395 S232.1
NetD233_1: D233.1 S233.1 | length 8.9
  Component Side w0.254: D233.1 -104.79,52.395 S233.1
NetD234_1: D234.1 S234.1 | length 9.9
  Component Side w0.254: D234.1 -124.094,52.395 S234.1
  Bottom Layer w0.254: S234.1@-121.793,51.83 S234.1
NetD235_1: D235.1 S235.1 | length 8.9
  Component Side w0.254: D235.1 -142.89,52.395 S235.1
NetD236_1: D236.1 S236.1 | length 8.8
  Component Side w0.254: D236.1 -161.813,52.395 S236.1
NetD237_1: D237.1 S237.1 | length 8.8
  Component Side w0.254: D237.1 -180.863,52.395 S237.1
NetD238_1: D238.1 S238.1 | length 8.9
  Component Side w0.254: D238.1 -200.04,52.395 S238.1
NetD239_1: D239.1 S239.1 | length 8
  Component Side w0.254: D239.1 -221.488,49.87 -218.963,52.395 S239.1
NetD240_1: D240.1 S240.1 | length 8.9
  Component Side w0.254: D240.1 -238.14,52.395 S240.1
NetD242_1: D242.1 S242.1 | length 14.3
  Component Side w0.254: S242.1 -258.43,52.395 D242.1
NetD243_1: D243.1 S243.1 | length 15.2
  Component Side w0.254: D243.1 -29.733,30.805 S243.1
NetD245_1: D245.1 S245.1 | length 9.8
  Component Side w0.254: D245.1 -61.468,30.765 -58.888,33.345 S245.1
NetD246_1: D246.1 S246.1 | length 9.9
  Component Side w0.254: D246.1 -76.215,33.345 S246.1 S246.1@-74.295,32.652
NetD247_1: D247.1 S247.1 | length 8.8
  Component Side w0.254: D247.1 -95.138,33.345 S247.1
NetD248_1: D248.1 S248.1 | length 8.9
  Component Side w0.254: D248.1 -114.315,33.345 S248.1
NetD249_1: D249.1 S249.1 | length 8.8
  Component Side w0.254: D249.1 -133.238,33.345 S249.1
NetD250_1: D250.1 S250.1 | length 8.9
  Component Side w0.254: D250.1 -152.415,33.345 S250.1
NetD251_1: D251.1 S251.1 | length 8.9
  Component Side w0.254: D251.1 -171.465,33.345 S251.1
NetD252_1: D252.1 S252.1 | length 8.9
  Component Side w0.254: D252.1 -190.515,33.345 S252.1
NetD253_1: D253.1 S253.1 | length 8.9
  Component Side w0.254: D253.1 -209.565,33.345 S253.1
NetD254_1: D254.1 S254.1 | length 8.8
  Component Side w0.254: D254.1 -228.488,33.345 S254.1
NetD256_1: D256.1 S256.1 | length 16.7
  Component Side w0.254: D256.1 -259.857,30.805 S256.1
NetD257_1: D257.1 S257.1 | length 15.3
  Component Side w0.254: D257.1 -22.748,11.755 S257.1
NetD258_1: D258.1 S258.1 | length 8.3
  Component Side w0.254: S258.1 -28.306,11.755 D258.1
NetD259_1: D259.1 S259.1 | length 6.6
  Component Side w0.254: S259.1 -269.098,87.955 D259.1
  Bottom Layer w0.254: S259.1 S259.1@-271.349,88.646
NetD260_1: D260.1 S260.1 | length 13.9
  Component Side w0.254: D260.1 -68.976,11.755 S260.1
NetD262_1: D262.1 S262.1 | length 14.2
  Component Side w0.254: D262.1 -150.256,11.755 S262.1
NetD264_1: D264.1 S264.1 | length 8.5
  Component Side w0.254: S264.1 -237.602,11.755 D264.1
NetD265_1: D265.1 S265.1 | length 15.1
  Component Side w0.254: D265.1 -232.044,11.755 S265.1
NetD266_1: D266.1 S266.1 | length 6.7
  Component Side w0.254: S266.1 -263.256,11.755 D266.1
NetD269_1: D269.1 S269.1 | length 9.3
  Component Side w0.254: S269.1 -265.415,30.805 D269.1
NetR302_1: R302.1 U301.13 | length 4.2
  Component Side w0.254: R302.1@-25.781,70.373 -25.91,70.373 -25.91,74.011 U301.13@-25.573,74.348
PC2: D215.2 D216.2 D217.2 D218.2 D219.2 D220.2 D221.2 D222.2 D223.2 D224.2 D225.2 D226.2 D227.2 D228.2 U301.5 | length 344.1
  Component Side w0.254: D228.2 D227.2 -254.96,62.992 -245.837,62.992 -242.265,59.42 -224.107,59.42 -220.535,62.992 ; D226.2 -232.735,62.992 -220.535,62.992 ; D225.2 -218.567,64.96 -220.535,62.992 ; D224.2 -202.367,62.992 ; D223.2 -183.317,62.992 ; D222.2 -164.267,62.992 ; D221.2 -145.344,62.992 ; D220.2 -126.294,62.992 ; D219.2 -107.244,62.992 ; D218.2 -88.067,62.992 ; D217.2 -69.017,62.992 ; v1@-33.909,77.724 -33.147,76.962 -33.147,76.28 ; U301.5@-26.139,80.287 -26.419,80.287 -26.419,80.624 -28.802,80.624 -33.147,76.28 ; v1(-19.685,62.23) -8.819,62.23 D215.2 ; -220.535,62.992 -202.367,62.992 ; -202.367,62.992 -183.317,62.992 ; -183.317,62.992 -164.267,62.992 ; -164.267,62.992 -145.344,62.992 ; -145.344,62.992 -126.294,62.992 ; -126.294,62.992 -107.244,62.992 ; -107.244,62.992 -88.067,62.992 ; -88.067,62.992 -69.017,62.992 ; -69.017,62.992 -50.221,62.992 D216.2 -43.617,69.596 -39.173,69.596 -37.903,70.866 -37.903,71.524 -33.147,76.28
  Bottom Layer w0.254: v1(-34.163,77.851) -30.48,74.168 -30.48,61.595 -28.321,59.436 -22.479,59.436 v1(-19.685,62.23)
PC4: D229.2 D230.2 D231.2 D232.2 D233.2 D234.2 D235.2 D236.2 D237.2 D238.2 D239.2 D240.2 D242.2 U301.26 | length 320.7
  Component Side w0.254: D242.2 -251.658,44.323 -244.912,44.323 ; D240.2 -244.912,44.323 ; D239.2 -219.146,44.323 -216.535,44.323 ; D238.2 -206.812,44.323 ; D237.2 -187.635,44.323 ; D236.2 -168.585,44.323 ; D235.2 -149.662,44.323 ; D234.2 -130.866,44.323 ; D233.2 -111.562,44.323 ; D232.2 -92.512,44.323 ; D231.2 -73.335,44.323 ; D230.2 -54.158,44.323 ; U301.26@-18.222,79.493 -16.374,79.493 -13.389,76.508 -13.389,71.447 -15.748,69.088 -19.671,69.088 -20.733,68.026 -20.733,65.683 -21.93,64.486 -21.93,59.526 -24.827,56.629 -24.827,47.489 D229.2 -24.003,45.974 -29.464,40.513 -34.29,40.513 -38.1,44.323 -54.158,44.323 ; -244.912,44.323 -230.124,44.323 -226.695,40.894 -219.964,40.894 -216.535,44.323 ; -216.535,44.323 -206.812,44.323 ; -206.812,44.323 -187.635,44.323 ; -187.635,44.323 -168.585,44.323 ; -168.585,44.323 -149.662,44.323 ; -149.662,44.323 -130.866,44.323 ; -130.866,44.323 -111.562,44.323 ; -111.562,44.323 -92.512,44.323 ; -92.512,44.323 -73.335,44.323 ; -73.335,44.323 -54.158,44.323
PD0: D201.2 D202.2 D203.2 D204.2 D205.2 D206.2 D207.2 D208.2 D209.2 D210.2 D211.2 D212.2 D213.2 D214.2 D259.2 U301.6 | length 555.1
  Component Side w0.254: D213.2 -249.865,82.169 ; D212.2 -230.942,82.169 ; D211.2 -211.892,82.169 ; D210.2 -192.842,82.169 ; D209.2 -173.665,82.169 ; D208.2 -154.615,82.169 ; D207.2 -135.692,82.169 ; D206.2 -116.515,82.169 ; D205.2 -97.465,82.169 ; D204.2 -78.415,82.169 ; D203.2 -59.492,82.169 ; D202.2 D201.2 -41.077,82.169 -59.492,82.169 ; U301.6@-26.704,79.722 -26.984,79.722 -27.321,80.058 -28.726,80.058 -37.449,71.336 -37.449,70.678 -38.985,69.142 -42.618,69.142 -49.222,62.538 -220.347,62.538 -223.919,58.966 -242.453,58.966 -246.025,62.538 -272.596,62.538 -273.812,63.754 -273.812,68.961 -267.081,75.692 -267.081,84.638 D259.2 D214.2 -262.961,82.169 -249.865,82.169 ; -249.865,82.169 -230.942,82.169 ; -230.942,82.169 -211.892,82.169 ; -211.892,82.169 -192.842,82.169 ; -192.842,82.169 -173.665,82.169 ; -173.665,82.169 -154.615,82.169 ; -154.615,82.169 -135.692,82.169 ; -135.692,82.169 -116.515,82.169 ; -116.515,82.169 -97.465,82.169 ; -97.465,82.169 -78.415,82.169 ; -78.415,82.169 -59.492,82.169
PD2: D257.2 D258.2 D260.2 D262.2 D264.2 D265.2 D266.2 U301.8 | length 583.8
  Component Side w0.254: D266.2 -258.77,5.969 -254.762,5.969 ; D265.2 D264.2 -238.308,5.969 ; D262.2 -154.742,5.969 ; D260.2 -70.866,6.985 -71.882,5.969 ; U301.8@-27.836,78.59 -28.894,78.59 -29.223,78.262 -29.238,78.262 -30.861,76.639 -30.861,65.405 -34.636,61.63 -219.971,61.63 -223.543,58.058 -242.829,58.058 -246.401,61.63 -263.243,61.63 -272.996,51.877 -272.996,36.122 -279.4,29.718 -279.4,26.416 -275.209,22.225 -271.018,22.225 -254.762,5.969 ; D257.2 D258.2 -29.012,5.969 -71.882,5.969 ; -254.762,5.969 -238.308,5.969 ; -238.308,5.969 -215.646,5.969 -212.217,2.54 -205.867,2.54 -202.438,5.969 -154.742,5.969 ; -154.742,5.969 -81.407,5.969 -77.851,2.413 -75.438,2.413 -71.882,5.969
PD4: D243.2 D245.2 D246.2 D247.2 D248.2 D249.2 D250.2 D251.2 D252.2 D253.2 D254.2 D256.2 D269.2 U301.10 | length 584.1
  Component Side w0.254: D269.2 D256.2 -259.278,25.146 -235.966,25.146 ; D254.2 -235.387,25.146 ; D253.2 -216.464,25.146 ; D252.2 -197.414,25.146 ; D251.2 -178.364,25.146 ; D250.2 -159.314,25.146 ; D249.2 -140.137,25.146 ; D248.2 -121.214,25.146 ; D247.2 -102.037,25.146 ; D246.2 -83.114,25.146 ; D245.2 -63.937,25.146 ; D243.2 -34.092,25.146 -63.937,25.146 ; U301.10@-27.27,76.045 -27.55,76.045 -27.55,75.708 -28.096,75.708 -29.953,73.851 -29.953,65.029 -34.26,60.722 -219.595,60.722 -223.167,57.15 -243.205,57.15 -246.777,60.722 -262.867,60.722 -272.088,51.501 -272.088,43.241 -264.915,36.068 -246.888,36.068 -235.966,25.146 ; -235.966,25.146 -235.387,25.146 ; -235.387,25.146 -216.464,25.146 ; -216.464,25.146 -197.414,25.146 ; -197.414,25.146 -178.364,25.146 ; -178.364,25.146 -159.314,25.146 ; -159.314,25.146 -140.137,25.146 ; -140.137,25.146 -121.214,25.146 ; -121.214,25.146 -102.037,25.146 ; -102.037,25.146 -83.114,25.146 ; -83.114,25.146 -63.937,25.146
RAW: CON301.A4B9 CON301.B4A9 D301.4 F301.2 | length 23.7
  Component Side w0.254: D301.4 -19.361,85.274 -20.65,86.563 CON301.B4A9 -20.65,89.963 -20.438,90.175 -20.438,90.56 -19.36,91.638 -17.597,91.638 -15.75,89.791 CON301.A4B9 -15.577,88.827 -15.577,87.967 -14.732,87.122 -13.208,87.122 -11.938,85.852 -11.938,81.915 F301.2@-11.176,81.153
RST: CON302.2 R301.2 U301.24 | length 11.9
  Component Side w0.254: U301.24@-17.936,76.61 -16.652,75.326 ; R301.2 -16.652,75.326 ; v1(-16.51,77.089) -16.652,76.947 -16.652,75.326
  Bottom Layer w0.254: v1(-16.51,77.089) -16.51,75.949 -15.695,75.134 -10.972,75.134 CON302.2
VCC: C302.2 C303.2 C304.2 F301.1 R301.1 U301.4 U301.31 U301.32 | length 44
  Component Side w0.254: v1(-31.877,79.502) -31.877,80.137 -31.036,80.978 C302.2 -29.512,81.19 -25.91,81.19 U301.4@-25.573,80.853 ; v1(-22.86,83.693) -21.702,83.693 C303.2 -21.209,83.237 ; U301.32@-21.896,82.55 -21.209,83.237 ; U301.31@-21.33,81.984 -21.209,82.106 -21.209,83.237 ; R301.1 v1(-15.352,75.961) v1@-15.24,76.073 ; v1(-13.462,78.105) -12.907,78.66 F301.1 C304.2
  Bottom Layer w0.254: v1(-31.877,79.502) -27.051,79.502 v1(-22.86,83.693) -17.083,77.916 -16.167,77.916 -15.683,77.432 -15.683,76.292 v1(-15.352,75.961) -15.352,76.215 v1(-13.462,78.105)
pads on no net: CON301. CON301.A8 CON301.B8 S201. S202. S203. S204. S205. S206. S207. S208. S209. S210. S211. S212. S213. S214. S215. S216. S217. S218. S219. S220. S221. S222. S223. S224. S225. S226. S227. S228. S229. S230. S231. S232. S233. S234. S235. S236. S237. S238. S239. S240. S242. S243. S245. S246. S247. S248. S249. S250. S251. S252. S253. S254. S256. S257. S258. S259. S260. S262. S264. S265. S266. S269.

## Polygon pours and split planes (outlines as drawn)
GND on Bottom Layer "Component Side-No Net" (solid, pour order 0): -7.366,91.059 -7.366,75.359 -36.469,75.486 -36.322,91.059

## Other copper
Component Side:
  pour cut-out: -4.117,97.055 ccw(c-4.117,95.555) -4.117,94.054 cw(c-4.117,90.555) -0.617,90.555 ccw(c0.883,90.555) 0.883,89.054 ccw(c0.883,90.555) 2.384,90.555 ccw(c-4.117,90.555)
  pour cut-out: 2.44,4.117 ccw(c0.94,4.117) -0.561,4.117 cw(c-4.06,4.117) -4.06,0.617 ccw(c-4.06,-0.883) -5.561,-0.883 ccw(c-4.06,-0.883) -4.06,-2.384 ccw(c-4.06,4.117)
  pour cut-out: -287.043,90.504 ccw(c-285.543,90.504) -284.043,90.504 cw(c-280.543,90.504) -280.543,94.004 ccw(c-280.543,95.504) -279.043,95.504 ccw(c-280.543,95.504) -280.543,97.004 ccw(c-280.543,90.504)
  pour cut-out: -280.49,-2.44 ccw(c-280.49,-0.94) -280.49,0.561 cw(c-280.49,4.06) -283.99,4.06 ccw(c-285.49,4.06) -285.49,5.561 ccw(c-285.49,4.06) -286.991,4.06 ccw(c-280.49,4.06)
Bottom Layer:
  pour cut-out: -32.979,72.99 ccw(c-32.979,74.491) -32.979,75.991 cw(c-32.979,79.491) -36.478,79.491 ccw(c-37.979,79.491) -37.979,80.991 ccw(c-37.979,79.491) -39.479,79.491 ccw(c-32.979,79.491)
  pour cut-out: -39.446,87.593 ccw(c-37.945,87.593) -36.445,87.593 cw(c-32.945,87.593) -32.945,91.093 ccw(c-32.945,92.593) -31.445,92.593 ccw(c-32.945,92.593) -32.945,94.094 ccw(c-32.945,87.593)
  pour cut-out: -287.043,90.504 ccw(c-285.543,90.504) -284.043,90.504 cw(c-280.543,90.504) -280.543,94.004 ccw(c-280.543,95.504) -279.043,95.504 ccw(c-280.543,95.504) -280.543,97.004 ccw(c-280.543,90.504)
  pour cut-out: 2.44,4.117 ccw(c0.94,4.117) -0.561,4.117 cw(c-4.06,4.117) -4.06,0.617 ccw(c-4.06,-0.883) -5.561,-0.883 ccw(c-4.06,-0.883) -4.06,-2.384 ccw(c-4.06,4.117)
  pour cut-out: -10.836,94.142 ccw(c-10.836,92.641) -10.836,91.141 cw(c-10.836,87.641) -7.337,87.641 ccw(c-5.836,87.641) -5.836,86.141 ccw(c-5.836,87.641) -4.336,87.641 ccw(c-10.836,87.641)
  pour cut-out: -280.49,-2.44 ccw(c-280.49,-0.94) -280.49,0.561 cw(c-280.49,4.06) -283.99,4.06 ccw(c-285.49,4.06) -285.49,5.561 ccw(c-285.49,4.06) -286.991,4.06 ccw(c-280.49,4.06)

## Silkscreen, mask and mechanical layers (free items; w line width, h text height)
Top Solder:
  text "RESET" at -12.192,72.136 h2.5
  text "BOOTLEG-1" at -125.349,11.938 h7
  text "RevA1" at -125.222,9.398 h3
  text "by 4pplet" at -109.093,9.271 h3
outline:
  lines w0.203: -195.49,94.615 -195.484,94.608 ; -119.294,94.604 -119.29,94.608
  lines w0.254: -282,0.01 cw(c-282,3.01) -285,3.01 -285,91.615 cw(c-282,91.615) -282,94.615 -195.49,94.615 ; -282,0.015 -3,0.015 ; -198.628,94.615 -119.294,94.615 ; -124.46,94.615 -3,94.615 cw(c-3,91.615) 0,91.615 0,3.01 cw(c-3,3.01) -3,0.01

## Text inside footprints (layer, text, board x,y; h text height)
CON301: Mechanical 15 "connector edge" at -15.25,96.25 h1 r180